# EAGLE board Board (EAGLE 9.7.0)
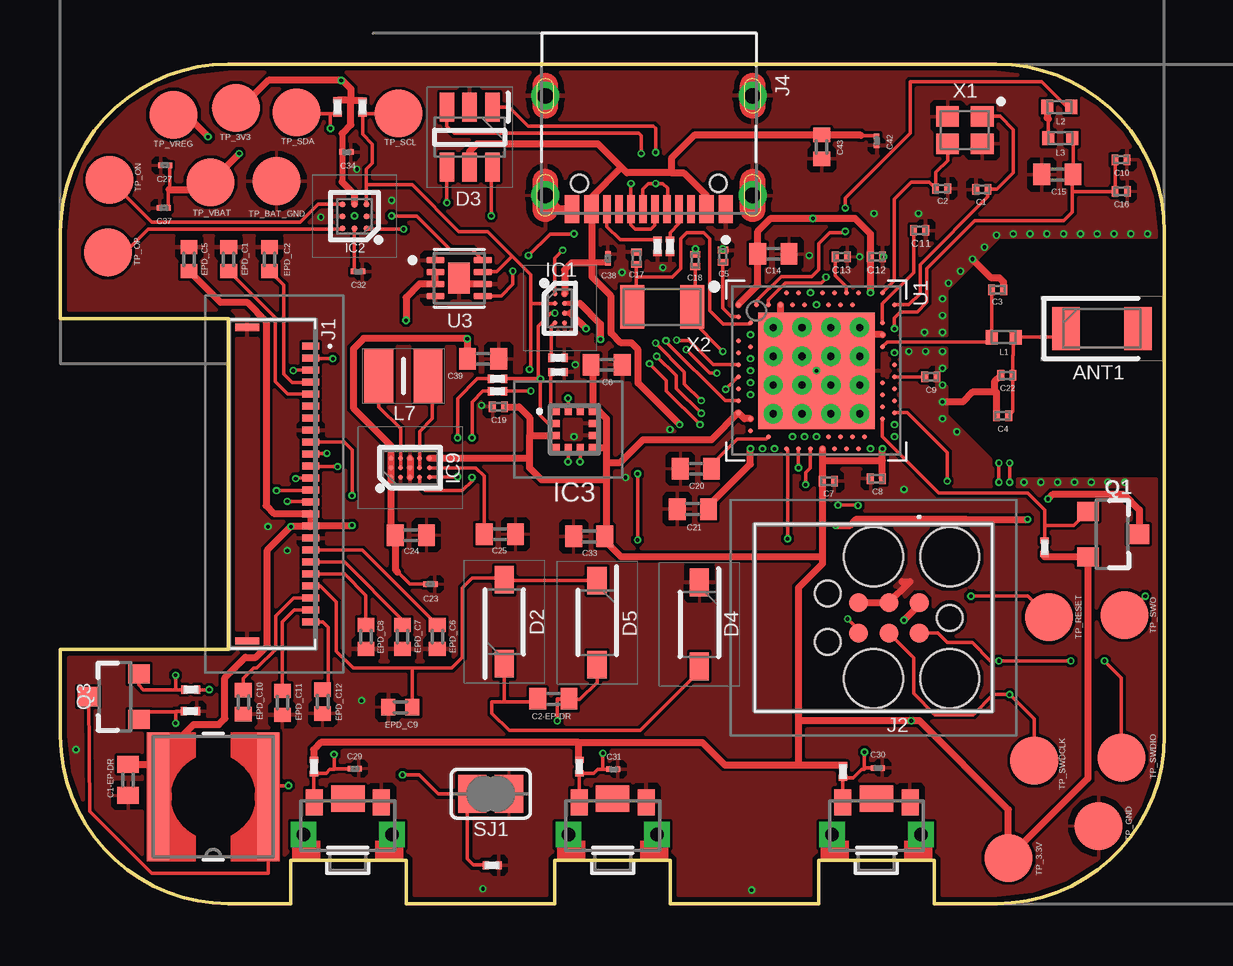
[diagram p0: board, top side]
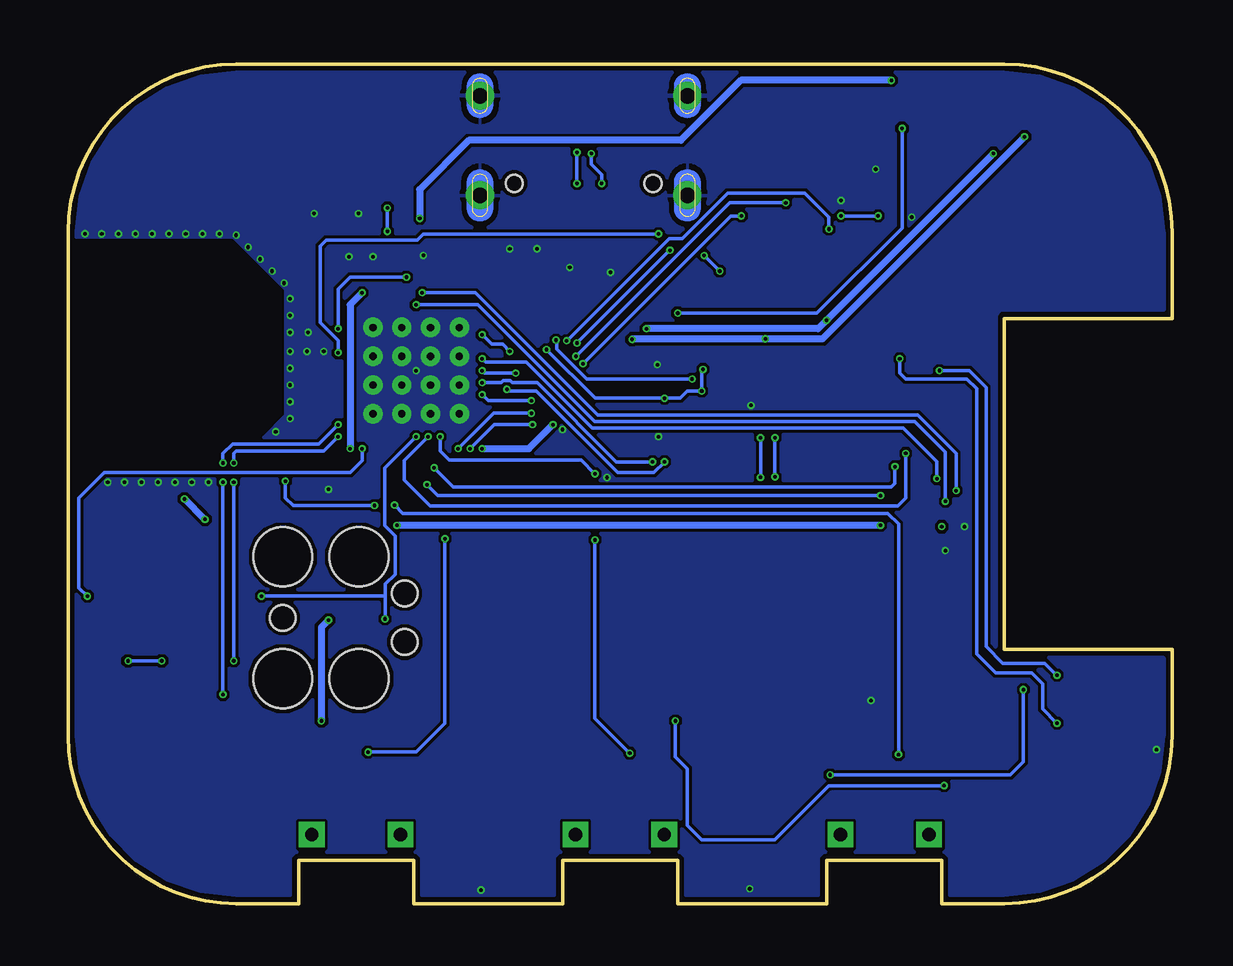
[diagram p1: board, bottom side, seen from below]

Size 46 x 35 mm. Coordinates in mm from the lower left corner, seen from the top.
Outline: 39,0 36.4,0 36.4,1.8 31.6,1.8 31.6,0 25.4,0 25.4,1.8 20.6,1.8 20.6,0 14.4,0 14.4,1.8 9.6,1.8 9.6,0 7,0 arc-90 0,7 0,10.6 7,10.6 7,24.4 0,24.4 0,28 arc-90 7,35 39,35 arc-90 46,28 46,7 arc-90 39,0
Copper layers (1*16): Top / Bottom
Stack-up Default Layer Stack: Top User Defined 0.035mm / Dielectric-1 User Defined 1.6mm / Bottom User Defined 0.035mm
Design rules: minimum copper width 5mil, minimum drill size 0.15mm, copper clearance wire_polygon to wire_polygon 5mil, copper clearance wire_polygon to pad_smd 5mil, copper clearance wire_polygon to via 5mil, copper clearance pad_smd to pad_smd 5mil, copper clearance pad_smd to via 5mil, copper clearance via to via 5mil, copper clearance smd to pad (same net) 5mil, copper clearance smd to smd (same net) 5mil, copper clearance smd to via (same net) 0mil, dimension clearance 0.2mm, via restrict clearance 0mil, restrict clearance 0mil, drill distance 6mil, keepout clearance 0mil

## Footprints (pad centres in the part's own frame; a part is rotated, then mirrored left to right if it is on the bottom)
2450AT18B100E_ANTC3216X140N = smd 1.15 x 1.8: 1 -1.5,0; 2 1.5,0
NORDIC_NRF_3_RESC0201_L = smd 0.28 x 0.43: 1 -0.255,0; 2 0.255,0
ESP32_C6_LIBRARY_1_ESP32_WROVER_EAGLE-LTSPICE_C0402 = smd 0.7 x 0.9: 1 -0.65,0; 2 0.65,0
GRM011R60J152KE01L_2_CAPC0201X13N = smd 0.22 x 0.23: 1 -0.185,0; 2 0.185,0
PERFECT_0402_0402 = smd 0.6 x 0.7: 1 -0.5,0; 2 0.5,0
ESP32_C6_LIBRARY_5_SOD3716X135N = smd 1.15 x 0.8: 1 -1.75,0; 2 1.75,0
ESP32_C6_LIBRARY_3_SOT95P280X145-6N = smd 1.2 x 0.6: 1 -1.25,0.95; 2 -1.25,0; 3 -1.25,-0.95; 4 1.25,-0.95; 5 1.25,0; 6 1.25,0.95
BQ25180YBGR_BGA8C40P2X4_100X155X50 = smd 0.2 x 0.2: A1 -0.2,0.6; A2 0.2,0.6; B1 -0.2,0.2; B2 0.2,0.2; C1 -0.2,-0.2; C2 0.2,-0.2; D1 -0.2,-0.6; D2 0.2,-0.6
DRV2605YZFR_BGA9C50P3X3_144X144X62 = smd 0.25 x 0.25: A1 -0.5,0.5; A2 0,0.5; A3 0.5,0.5; B1 -0.5,0; B2 0,0; B3 0.5,0; C1 -0.5,-0.5; C2 0,-0.5; C3 0.5,-0.5
BMA423_BMA423 = smd 0.3 x 0.35: 1 -0.75,-0.775; 2 -0.25,-0.775; 3 0.25,-0.775; 4 0.75,-0.775; 7 0.75,0.775; 8 0.25,0.775; 9 -0.25,0.775; 10 -0.75,0.775 | smd 0.35 x 0.3: 5 0.775,-0.25; 6 0.775,0.25; 11 -0.775,0.25; 12 -0.775,-0.25
RT6160AWSC_BGA15C40P3X5_140X230X60 = smd 0.216 x 0.216: A1 -0.4,0.8; A2 0,0.8; A3 0.4,0.8; B1 -0.4,0.4; B2 0,0.4; B3 0.4,0.4; C1 -0.4,0; C2 0,0; C3 0.4,0; D1 -0.4,-0.4; D2 0,-0.4; D3 0.4,-0.4; E1 -0.4,-0.8; E2 0,-0.8; E3 0.4,-0.8
503480-2400_5034802400 = smd 0.3 x 0.7: 1 -5.75,1.525; 2 -5.25,1.525; 3 -4.75,1.525; 4 -4.25,1.525; 5 -3.75,1.525; 6 -3.25,1.525; 7 -2.75,1.525; 8 -2.25,1.525; 9 -1.75,1.525; 10 -1.25,1.525; 11 -0.75,1.525; 12 -0.25,1.525; 13 0.25,1.525; 14 0.75,1.525; 15 1.25,1.525; 16 1.75,1.525; 17 2.25,1.525; 18 2.75,1.525; 19 3.25,1.525; 20 3.75,1.525; 21 4.25,1.525; 22 4.75,1.525; 23 5.25,1.525; 24 5.75,1.525 | smd 0.3 x 1: MP1 -6.54,-1.125; MP2 6.54,-1.125
TC2030-IDC_TC2030IDC = smd 0.783 x 0.783: 1 -0.953,-0.635; 2 -0.953,0.635; 3 0.317,-0.635; 4 0.317,0.635; 5 1.588,-0.635; 6 1.588,0.635 | hole 2.451: -2.223,-2.54; -2.223,2.54; 0.952,-2.54; 0.952,2.54 | hole 1.067: -2.223,0; 2.857,-1.016; 2.857,1.016
KH-TYPE-C-16P_KINGHELM_KH-TYPE-C-16P = smd 0.6 x 1.15: A1_B12 -3.2,4.725; A4_B9 -2.4,4.725; A9_B4 2.4,4.725; A12_B1 3.2,4.725 | smd 0.3 x 1.15: A5 -1.25,4.725; A6 -0.25,4.725; A7 0.25,4.725; A8 1.25,4.725; B5 1.75,4.725; B6 0.75,4.725; B7 -0.75,4.725; B8 -1.75,4.725 | drill 0.65 pad 1.05: SH1 -4.32,0; SH2 4.32,0; SH3 -4.32,4.15; SH4 4.32,4.15 | hole 0.7: -2.89,3.65; 2.89,3.65
NORDIC_NRF_2_RESC0402_L = smd 0.5 x 0.6: 1 -0.5,0; 2 0.5,0
ESP32_C6_LIBRARY_2_IND_4828-WE-TPC_WRE = smd 0.9 x 5.3: 1 -2.286,0; 2 2.286,0
MLP2016SR47MT0S1_INDC2016X100N = smd 1.2 x 2.2: 1 -1.028,0; 2 1.028,0
ESP32_C6_LIBRARY_4_ESP32_C6_LIBRARY_4_ESP32_C6_LIBRARY_4_ESP32_C6_LIBRARY_4_ESP32_WROVER_SPARKFUN-DISCRETESEMI_SOT23-3 = smd 0.8 x 0.9: 1 -0.95,-1; 2 0.95,-1; 3 0,1.1
ERA-1AEB3401C_0201 = smd 0.35 x 0.25: 1 0,0.275; 2 0,-0.275
ESP32_C6_LIBRARY_7_JUMPER_SJ = smd 1.168 x 1.6: 1 -0.762,0; 2 0.762,0
2025-10-22_07-23-44_LIBRARY_SW_EVP-AKE31A_PAN = smd 0.711 x 1.092: 1 -1.4,-0.972; 2 1.4,-0.972 | drill 0.559 pad 0.914 square: 3 -1.848,0.381; 4 1.848,0.381 | smd 1.397 x 1.092: 5 0,-1.124
HECTOR_WATCH_1_TP20R = smd 2 x 2: TP 0,0
NORDIC_NRF_4_AQFN50P700X700X85_HS-74N = smd 4.85 x 4.85: P$74 0,0 | drill 0.3 pad 0.6: P$75 -1.8,1.8; P$76 -0.6,1.8; P$77 0.6,1.8; P$78 1.8,1.8; P$79 -1.8,0.6; P$80 -0.6,0.6; P$81 0.6,0.6; P$82 1.8,0.6; P$83 -1.8,-0.6; P$84 -0.6,-0.6; P$85 0.6,-0.6; P$86 1.8,-0.6; P$87 -1.8,-1.8; P$88 -0.6,-1.8; P$89 0.6,-1.8; P$90 1.8,-1.8 | smd 0.2 x 0.2: P$A8 -1.25,3.25; P$A10 -0.75,3.25; P$A12 -0.25,3.25; P$A14 0.25,3.25; P$A16 0.75,3.25; P$A18 1.25,3.25; P$A20 1.75,3.25; P$A22 2.25,3.25; P$A23 2.75,3.25; P$AA24 3.25,-2.25; P$AB2 -2.75,-2.5; P$AC5 -2,-2.75; P$AC9 -1,-2.75; P$AC11 -0.5,-2.75; P$AC13 0,-2.75; P$AC15 0.5,-2.75; P$AC17 1,-2.75; P$AC19 1.5,-2.75; P$AC21 2,-2.75; P$AC24 3.25,-2.75; P$AD2 -2.75,-3.25; P$AD4 -2.25,-3.25; P$AD6 -1.75,-3.25; P$AD8 -1.25,-3.25; P$AD10 -0.75,-3.25; P$AD12 -0.25,-3.25; P$AD14 0.25,-3.25; P$AD16 0.75,-3.25; P$AD18 1.25,-3.25; P$AD20 1.75,-3.25; P$AD22 2.25,-3.25; P$AD23 2.75,-3.25; P$B1 -3.25,2.75; P$B3 -2.5,2.75; P$B5 -2,2.75; P$B7 -1.5,2.75; P$B9 -1,2.75; P$B11 -0.5,2.75; P$B13 0,2.75; P$B15 0.5,2.75; P$B17 1,2.75; P$B19 1.5,2.75; P$B24 3.25,2.75; P$C1 -3.25,2.25; P$D2 -2.75,2; P$D23 2.75,2; P$E24 3.25,1.75; P$F2 -2.75,1.5; P$F23 2.75,1.5; P$G1 -3.25,1.25; P$H2 -2.75,1; P$H23 2.75,1; P$J1 -3.25,0.75; P$J24 3.25,0.75; P$K2 -2.75,0.5; P$L1 -3.25,0.25; P$L24 3.25,0.25; P$M2 -2.75,0; P$N1 -3.25,-0.25; P$N24 3.25,-0.25; P$P2 -2.75,-0.5; P$P23 2.75,-0.5; P$R1 -3.25,-0.75; P$R24 3.25,-0.75; P$T2 -2.75,-1; P$T23 2.75,-1; P$U1 -3.25,-1.25; P$U24 3.25,-1.25; P$V23 2.75,-1.5; P$W1 -3.25,-1.75; P$W24 3.25,-1.75; P$Y2 -2.75,-2; P$Y23 2.75,-2
ESP32_C6_LIBRARY_SON50P200X200X80-9N = smd 0.76 x 0.27: 1 -0.985,0.75; 2 -0.985,0.25; 3 -0.985,-0.25; 4 -0.985,-0.75; 5 0.985,-0.75; 6 0.985,-0.25; 7 0.985,0.25; 8 0.985,0.75 | smd 0.9 x 1.3: 9 0,0
NORDIC_NRF_BT-XTAL_2016_N = smd 0.95 x 0.85: 1 -0.725,-0.575; 2 0.725,-0.575; 3 0.725,0.575; 4 -0.725,0.575
NORDIC_NRF_1_XTAL_3215_N = smd 1 x 1.8: 1 -1.25,0; 2 1.25,0

## Placement (x,y rotation side)
ANT1  2450AT18B100E  [2450AT18B100E_ANTC3216X140N]  43.39,23.98 0 top
C1  12pF  [NORDIC_NRF_3_RESC0201_L]  38.39,29.78 180 top
C1-EP-DR  10μF  [ESP32_C6_LIBRARY_1_ESP32_WROVER_EAGLE-LTSPICE_C0402]  2.82,5.16 270 top
C2  12pF  [NORDIC_NRF_3_RESC0201_L]  36.72,29.81 0 top
C2-EP-DR  4.7μF/25V  [ESP32_C6_LIBRARY_1_ESP32_WROVER_EAGLE-LTSPICE_C0402]  20.54,8.54 0 top
C3  1pF  [NORDIC_NRF_3_RESC0201_L]  39.05,25.59 0 top
C4  1pF  [NORDIC_NRF_3_RESC0201_L]  39.26,20.34 180 top
C5  100nF  [NORDIC_NRF_3_RESC0201_L]  27.6,26.99 90 top
C6  4.7μF  [ESP32_C6_LIBRARY_1_ESP32_WROVER_EAGLE-LTSPICE_C0402]  22.76,22.46 0 top
C7  100nF  [NORDIC_NRF_3_RESC0201_L]  32,17.61 0 top
C8  100nF  [NORDIC_NRF_3_RESC0201_L]  34,17.71 180 top
C9  820pF  [NORDIC_NRF_3_RESC0201_L]  36.27,21.96 0 top
C10  N.C.  [NORDIC_NRF_3_RESC0201_L]  44.19,31.01 0 top
C11  100nF  [NORDIC_NRF_3_RESC0201_L]  35.8,28.07 0 top
C12  100nF  [NORDIC_NRF_3_RESC0201_L]  34,26.96 0 top
C13  N.C.  [NORDIC_NRF_3_RESC0201_L]  32.54,26.96 0 top
C14  4.7μF  [ESP32_C6_LIBRARY_1_ESP32_WROVER_EAGLE-LTSPICE_C0402]  29.71,27.09 0 top
C15  1.0μF  [ESP32_C6_LIBRARY_1_ESP32_WROVER_EAGLE-LTSPICE_C0402]  41.54,30.39 180 top
C16  47nF  [NORDIC_NRF_3_RESC0201_L]  44.2,29.69 0 top
C17  12pF  [NORDIC_NRF_3_RESC0201_L]  24,26.91 270 top
C18  12pF  [NORDIC_NRF_3_RESC0201_L]  26.45,26.81 270 top
C19  100nF  [NORDIC_NRF_3_RESC0201_L]  18.25,20.71 180 top
C20  4.7μF  [ESP32_C6_LIBRARY_1_ESP32_WROVER_EAGLE-LTSPICE_C0402]  26.48,18.13 180 top
C21  4.7μF  [ESP32_C6_LIBRARY_1_ESP32_WROVER_EAGLE-LTSPICE_C0402]  26.35,16.45 180 top
C22  N.C.  [NORDIC_NRF_3_RESC0201_L]  39.43,22.02 180 top
C23  0.1μF  [GRM011R60J152KE01L_2_CAPC0201X13N]  15.42,13.32 0 top
C24  10μF  [ESP32_C6_LIBRARY_1_ESP32_WROVER_EAGLE-LTSPICE_C0402]  14.6,15.36 180 top
C25  22μF  [ESP32_C6_LIBRARY_1_ESP32_WROVER_EAGLE-LTSPICE_C0402]  18.31,15.4 0 top
C27  0.1μF  [GRM011R60J152KE01L_2_CAPC0201X13N]  4.36,30.78 0 top
C29  1μF  [GRM011R60J152KE01L_2_CAPC0201X13N]  12.26,5.63 180 top
C30  1μF  [GRM011R60J152KE01L_2_CAPC0201X13N]  34.06,5.66 180 top
C31  1μF  [GRM011R60J152KE01L_2_CAPC0201X13N]  23.04,5.6 180 top
C32  1μF  [GRM011R60J152KE01L_2_CAPC0201X13N]  12.4,26.35 180 top
C33  22μF  [ESP32_C6_LIBRARY_1_ESP32_WROVER_EAGLE-LTSPICE_C0402]  22.03,15.31 180 top
C34  0.1μF  [GRM011R60J152KE01L_2_CAPC0201X13N]  11.92,31.33 180 top
C37  1μF  [GRM011R60J152KE01L_2_CAPC0201X13N]  4.31,29 0 top
C38  1μF  [GRM011R60J152KE01L_2_CAPC0201X13N]  22.82,26.9 270 top
C39  10μF  [ESP32_C6_LIBRARY_1_ESP32_WROVER_EAGLE-LTSPICE_C0402]  17.61,22.71 0 top
C42  0.1μF  [GRM011R60J152KE01L_2_CAPC0201X13N]  34.01,31.8 90 top
C43  4.7μF  [PERFECT_0402_0402]  31.72,31.55 270 top
D2  MBR0530  [ESP32_C6_LIBRARY_5_SOD3716X135N]  18.49,11.75 90 top
D3  USBLC6-2SC6Y  [ESP32_C6_LIBRARY_3_SOT95P280X145-6N]  17.05,31.95 270 top
D4  MBR0530  [ESP32_C6_LIBRARY_5_SOD3716X135N]  26.62,11.64 270 top
D5  MBR0530  [ESP32_C6_LIBRARY_5_SOD3716X135N]  22.36,11.72 270 top
EPD_C1  1μF/50V  [PERFECT_0402_0402]  7.01,26.87 270 top
EPD_C2  1μF/50V  [PERFECT_0402_0402]  8.71,26.87 270 top
EPD_C5  1μF/50V  [PERFECT_0402_0402]  5.36,26.87 270 top
EPD_C6  1μF/50V  [PERFECT_0402_0402]  15.7,11.12 90 top
EPD_C7  1μF/50V  [PERFECT_0402_0402]  14.25,11.12 90 top
EPD_C8  1μF/50V  [PERFECT_0402_0402]  12.73,11.12 90 top
EPD_C9  1μF/50V  [PERFECT_0402_0402]  14.16,8.19 0 top
EPD_C10  1μF/50V  [PERFECT_0402_0402]  7.62,8.4 90 top
EPD_C11  1μF/50V  [PERFECT_0402_0402]  9.25,8.37 90 top
EPD_C12  1μF/50V  [PERFECT_0402_0402]  10.92,8.42 90 top
IC1  BQ25180YBGR  [BQ25180YBGR_BGA8C40P2X4_100X155X50]  20.81,24.82 0 top
IC2  DRV2605YZFR  [DRV2605YZFR_BGA9C50P3X3_144X144X62]  12.25,28.66 180 top
IC3  BMA423  [BMA423_BMA423]  21.41,19.77 270 top
IC9  RT6160AWSC  [RT6160AWSC_BGA15C40P3X5_140X230X60]  14.57,18.17 90 top
J1  503480-2400  [503480-2400_5034802400]  8.9,17.49 270 top
J2  TC2030-IDC  [TC2030-IDC_TC2030IDC]  34.83,11.92 180 top
J4  KH-TYPE-C-16P  [KH-TYPE-C-16P_KINGHELM_KH-TYPE-C-16P]  24.52,33.68 180 top
L1  3.9nH  [NORDIC_NRF_2_RESC0402_L]  39.3,23.61 0 top
L2  10μH  [NORDIC_NRF_2_RESC0402_L]  41.61,33.21 180 top
L3  15nH  [NORDIC_NRF_2_RESC0402_L]  41.66,31.91 0 top
L5  68μH  [ESP32_C6_LIBRARY_2_IND_4828-WE-TPC_WRE]  6.37,4.46 180 top
L7  FTC252012SR47MBCA  [MLP2016SR47MT0S1_INDC2016X100N]  14.29,22 0 top
Q1  20V/4.2A/52mΩ/1.4W  [ESP32_C6_LIBRARY_4_ESP32_C6_LIBRARY_4_ESP32_C6_LIBRARY_4_ESP32_C6_LIBRARY_4_ESP32_WROVER_SPARKFUN-DISCRETESEMI_SOT23-3]  43.81,15.4 270 top
Q3  SI1308EDL-T1-GE3  [ESP32_C6_LIBRARY_4_ESP32_C6_LIBRARY_4_ESP32_C6_LIBRARY_4_ESP32_C6_LIBRARY_4_ESP32_WROVER_SPARKFUN-DISCRETESEMI_SOT23-3]  2.27,8.63 90 top
R1_EP_DR  0.47  [ERA-1AEB3401C_0201]  5.43,8.92 270 top
R1_TYPE_SEL  2.2  [ERA-1AEB3401C_0201]  17.99,1.6 270 top
R1_USB  5k1  [ERA-1AEB3401C_0201]  25.4,27.4 180 top
R2  0  [ERA-1AEB3401C_0201]  18.21,21.88 270 top
R2_EP_DR  10k  [ERA-1AEB3401C_0201]  5.42,8.02 270 top
R2_USB  5k1  [ERA-1AEB3401C_0201]  24.87,27.4 0 top
R3  0  [ERA-1AEB3401C_0201]  20.73,22.16 270 top
R4  0  [ERA-1AEB3401C_0201]  18.21,21.36 270 top
R5  10k  [ERA-1AEB3401C_0201]  32.6,5.51 180 top
R7  10k  [ERA-1AEB3401C_0201]  10.56,5.71 180 top
R8  10k  [ERA-1AEB3401C_0201]  21.62,5.71 180 top
R9  10k  [ERA-1AEB3401C_0201]  20.73,22.76 270 top
R17  3k3  [ERA-1AEB3401C_0201]  12.59,33.21 0 top
R18  3k3  [ERA-1AEB3401C_0201]  11.55,33.21 0 top
R_PWR_EPD  10k  [ERA-1AEB3401C_0201]  41.01,14.86 0 top
SJ1  [ESP32_C6_LIBRARY_7_JUMPER_SJ]  17.93,4.58 180 top
SW_DN  2025-10-22_07-23-44_LIBRARY_EVP-AKE31ASW_EVP-AKE31A_PAN  [2025-10-22_07-23-44_LIBRARY_SW_EVP-AKE31A_PAN]  11.97,3.26 180 top
SW_ENT  2025-10-22_07-23-44_LIBRARY_EVP-AKE31ASW_EVP-AKE31A_PAN  [2025-10-22_07-23-44_LIBRARY_SW_EVP-AKE31A_PAN]  23.01,3.26 180 top
SW_UP  2025-10-22_07-23-44_LIBRARY_EVP-AKE31ASW_EVP-AKE31A_PAN  [2025-10-22_07-23-44_LIBRARY_SW_EVP-AKE31A_PAN]  34,3.26 180 top
TP_3.3V  HECTOR_WATCH_1_TPTP20R  [HECTOR_WATCH_1_TP20R]  39.5,1.91 0 top
TP_3V3  HECTOR_WATCH_1_TPTP20R  [HECTOR_WATCH_1_TP20R]  7.31,33.17 0 top
TP_BAT_GND  HECTOR_WATCH_1_TPTP20R  [HECTOR_WATCH_1_TP20R]  9,30.12 0 top
TP_GND  HECTOR_WATCH_1_TPTP20R  [HECTOR_WATCH_1_TP20R]  43.25,3.23 0 top
TP_ON  HECTOR_WATCH_1_TPTP20R  [HECTOR_WATCH_1_TP20R]  2.05,30.17 90 top
TP_OP  HECTOR_WATCH_1_TPTP20R  [HECTOR_WATCH_1_TP20R]  1.98,27.15 90 top
TP_RESET  HECTOR_WATCH_1_TPTP20R  [HECTOR_WATCH_1_TP20R]  41.18,11.94 0 top
TP_SCL  HECTOR_WATCH_1_TPTP20R  [HECTOR_WATCH_1_TP20R]  14.09,32.94 0 top
TP_SDA  HECTOR_WATCH_1_TPTP20R  [HECTOR_WATCH_1_TP20R]  9.83,32.98 0 top
TP_SWDCLK  HECTOR_WATCH_1_TPTP20R  [HECTOR_WATCH_1_TP20R]  40.58,5.96 0 top
TP_SWDIO  HECTOR_WATCH_1_TPTP20R  [HECTOR_WATCH_1_TP20R]  44.21,6.08 0 top
TP_SWO  HECTOR_WATCH_1_TPTP20R  [HECTOR_WATCH_1_TP20R]  44.34,12.03 0 top
TP_VBAT  HECTOR_WATCH_1_TPTP20R  [HECTOR_WATCH_1_TP20R]  6.25,30.07 0 top
TP_VREG  HECTOR_WATCH_1_TPTP20R  [HECTOR_WATCH_1_TP20R]  4.71,32.89 0 top
U1  NRF52840_QF  [NORDIC_NRF_4_AQFN50P700X700X85_HS-74N]  31.5,22.22 0 top
U3  MAX17048G+T10  [ESP32_C6_LIBRARY_SON50P200X200X80-9N]  16.61,26.08 0 top
X1  32MHz  [NORDIC_NRF_BT-XTAL_2016_N]  37.69,32.25 180 top
X2  32.768kHz  [NORDIC_NRF_1_XTAL_3215_N]  25.07,24.88 180 top

## Library data of the parts
ANT1 = C:/Users/albab/AppData/Local/Temp/Neutron/ElectronFileOutput/17580/lbr-745c33fa-0988-44a0-ba7f-04a992b1e21d/InkTime_v5.lbr; ARROW_PART_NUMBER: 2450AT18B100E; ARROW_PRICE-STOCK: https://www.arrow.com/en/products/2450at18b100e/johanson-dielectrics?utm_currency=USD&region=nac; DESCRIPTION: Antennas 2.45GHz ANTENNA; HEIGHT: 1.4mm; MANUFACTURER_NAME: JOHANSON TECHNOLOGY; MANUFACTURER_PART_NUMBER: 2450AT18B100E; MOUSER_PART_NUMBER: 609-2450AT18B100E; MOUSER_PRICE-STOCK: https://www.mouser.co.uk/ProductDetail/Johanson-Technology/2450AT18B100E?qs=yCnrNFeXz%252Bh5MFsFIXGZGA%3D%3D
C1-C5 C7-C13 C16-C19 C22 C43 EPD_C1 EPD_C2 EPD_C5-EPD_C12 L1-L3 R1_EP_DR R1_TYPE_SEL R1_USB R2 R2_EP_DR R2_USB R3-R5 R7-R9 R17 R18 R_PWR_EPD TP_3.3V TP_3V3 TP_BAT_GND TP_GND TP_ON TP_OP TP_RESET TP_SCL TP_SDA TP_SWDCLK TP_SWDIO TP_SWO TP_VBAT TP_VREG U1 X1 X2 = C:/Users/albab/AppData/Local/Temp/Neutron/ElectronFileOutput/17580/lbr-745c33fa-0988-44a0-ba7f-04a992b1e21d/InkTime_v5.lbr
C1-EP-DR C2-EP-DR C6 C14 C15 C20 C21 C24 C25 C33 C39 = C:/Users/albab/AppData/Local/Temp/Neutron/ElectronFileOutput/17580/lbr-745c33fa-0988-44a0-ba7f-04a992b1e21d/InkTime_v5.lbr; SPICEMODEL: NONE; SPICEPREFIX: C
C23 C27 C29-C32 C34 C37 C38 C42 = InkTime_v5; AVAILABILITY: In Stock; CHECK_PRICES: https://www.snapeda.com/parts/GRM011R60J152KE01L/Murata/view-part/?ref=eda; DESCRIPTION: SMD Capacitor X5R(EIA) with Capacitance: 1500pF Tol. 10%. Rated Voltage: 6.3Vdc; MF: Murata; MP: GRM011R60J152KE01L; PACKAGE: 0201 Murata; PRICE: None; SNAPEDA_LINK: https://www.snapeda.com/parts/GRM011R60J152KE01L/Murata/view-part/?ref=snap
D2 D4 D5 = C:/Users/albab/AppData/Local/Temp/Neutron/ElectronFileOutput/17580/lbr-745c33fa-0988-44a0-ba7f-04a992b1e21d/InkTime_v5.lbr; AVAILABILITY: In Stock; CHECK_PRICES: https://www.snapeda.com/parts/MBR0530/Onsemi/view-part/?ref=eda; DESCRIPTION: Diode Schottky 30 V 500mA Surface Mount SOD-123; MF: ON Semiconductor; MP: MBR0530; PACKAGE: SOD-123-2 ON Semiconductor; PRICE: None; PURCHASE-URL: https://www.snapeda.com/api/url_track_click_mouser/?unipart_id=179458&manufacturer=ON Semiconductor&part_name=MBR0530&search_term=None; SNAPEDA_LINK: https://www.snapeda.com/parts/MBR0530/Onsemi/view-part/?ref=snap
D3 = InkTime_v5; AVAILABILITY: In Stock; CHECK_PRICES: https://www.snapeda.com/parts/USBLC6-2SC6Y/STMicroelectronics/view-part/?ref=eda; DESCRIPTION: 17V Clamp 5A (8/20µs) Ipp Tvs Diode Surface Mount SOT-23-6; MF: STMicroelectronics; MP: USBLC6-2SC6Y; PACKAGE: SOT-23-6 STMicroelectronics; PRICE: None; SNAPEDA_LINK: https://www.snapeda.com/parts/USBLC6-2SC6Y/STMicroelectronics/view-part/?ref=snap
IC1 = C:/Users/albab/AppData/Local/Temp/Neutron/ElectronFileOutput/17580/lbr-745c33fa-0988-44a0-ba7f-04a992b1e21d/InkTime_v5.lbr; ARROW_PART_NUMBER: BQ25180YBGR; ARROW_PRICE-STOCK: https://www.arrow.com/en/products/bq25180ybgr/texas-instruments?utm_currency=USD&region=nac; DESCRIPTION: Charger IC Lithium Ion/Polymer, Lithium Iron Phosphate 8-DSBGA (1.6x1.1); HEIGHT: 0.5mm; MANUFACTURER_NAME: Texas Instruments; MANUFACTURER_PART_NUMBER: BQ25180YBGR; MOUSER_PART_NUMBER: 595-BQ25180YBGR; MOUSER_PRICE-STOCK: https://www.mouser.co.uk/ProductDetail/Texas-Instruments/BQ25180YBGR?qs=doiCPypUmgEWjAK%252BJAX6Tw%3D%3D
IC2 = InkTime_v5; ARROW_PART_NUMBER: DRV2605YZFR; ARROW_PRICE-STOCK: https://www.arrow.com/en/products/drv2605yzfr/texas-instruments?region=nac; DESCRIPTION: Haptic Driver for ERM/LRA with Built-In Library and Smart Loop Architecture; HEIGHT: 0.625mm; MANUFACTURER_NAME: Texas Instruments; MANUFACTURER_PART_NUMBER: DRV2605YZFR
IC3 = C:/Users/albab/AppData/Local/Temp/Neutron/ElectronFileOutput/17580/lbr-745c33fa-0988-44a0-ba7f-04a992b1e21d/InkTime_v5.lbr; ARROW_PART_NUMBER: BMA423; ARROW_PRICE-STOCK: https://www.arrow.com/en/products/bma423/bosch; DESCRIPTION: Accelerometers Triaxial low-g 12bit Acceleration Sensor; HEIGHT: 1mm; MANUFACTURER_NAME: BOSCH; MANUFACTURER_PART_NUMBER: BMA423; MOUSER_PART_NUMBER: 262-BMA423; MOUSER_PRICE-STOCK: https://www.mouser.co.uk/ProductDetail/Bosch-Sensortec/BMA423?qs=HXFqYaX1Q2xC%252BSgeGoX3mg%3D%3D
IC9 = C:/Users/albab/AppData/Local/Temp/Neutron/ElectronFileOutput/17580/lbr-745c33fa-0988-44a0-ba7f-04a992b1e21d/InkTime_v5.lbr; DESCRIPTION: Buck-Boost Regulator Positive Output Step-Up/Step-Down I2C DC-DC Controller IC 15-WL-CSP (BSC) (1.4x2.3); HEIGHT: 0.6mm; MANUFACTURER_NAME: RICHTEK; MANUFACTURER_PART_NUMBER: RT6160AWSC; MOUSER_PART_NUMBER: 835-RT6160AWSC; MOUSER_PRICE-STOCK: https://www.mouser.co.uk/ProductDetail/Richtek/RT6160AWSC?qs=amGC7iS6iy%2FLd9PSoixZXQ%3D%3D
J1 = InkTime_v5; DESCRIPTION: FFC & FPC Connectors 0.5mm FPC RA SMT Dual Contact 24Ckt; HEIGHT: 1.87mm; MANUFACTURER_NAME: Molex; MANUFACTURER_PART_NUMBER: 503480-2400; MOUSER_PART_NUMBER: 538-503480-2400; MOUSER_PRICE-STOCK: https://www.mouser.co.uk/ProductDetail/Molex/503480-2400?qs=OAhjpuo3Vu7efIoxFh9AOw%3D%3D
J2 = C:/Users/albab/AppData/Local/Temp/Neutron/ElectronFileOutput/17580/lbr-745c33fa-0988-44a0-ba7f-04a992b1e21d/InkTime_v5.lbr; DESCRIPTION: CABLE ADAPTER 6 POS; HEIGHT: 19mm; MANUFACTURER_NAME: Tag Connect; MANUFACTURER_PART_NUMBER: TC2030-IDC
J4 = InkTime_v5; AVAILABILITY: Not in stock; CHECK_PRICES: https://www.snapeda.com/parts/KH-TYPE-C-16P/Kinghelm/view-part/?ref=eda; MF: kinghelm; MP: KH-TYPE-C-16P; PACKAGE: None; PRICE: None; SNAPEDA_LINK: https://www.snapeda.com/parts/KH-TYPE-C-16P/Kinghelm/view-part/?ref=snap
L5 = C:/Users/albab/AppData/Local/Temp/Neutron/ElectronFileOutput/17580/lbr-745c33fa-0988-44a0-ba7f-04a992b1e21d/InkTime_v5.lbr; COPYRIGHT: Copyright (C) 2024 Ultra Librarian. All rights reserved.; MANUFACTURER_PART_NUMBER: 744043680; MFR_NAME: Wurth Electronics
L7 = C:/Users/albab/AppData/Local/Temp/Neutron/ElectronFileOutput/17580/lbr-745c33fa-0988-44a0-ba7f-04a992b1e21d/InkTime_v5.lbr; DESCRIPTION: SMD / SMT Inductors (Coils), L=0.47?H, L x W x T :; HEIGHT: 1mm; JLCPCB: https://jlcpcb.com/partdetail/6763488-FTC252012SR47MBCA/C5832368; MANUFACTURER_NAME: TDK; MANUFACTURER_PART_NUMBER: FTC252012SR47MBCA
Q1 = InkTime_v5; PROD_ID: TRAN-14388
Q3 = C:/Users/albab/AppData/Local/Temp/Neutron/ElectronFileOutput/17580/lbr-745c33fa-0988-44a0-ba7f-04a992b1e21d/InkTime_v5.lbr; AVAILABILITY: In Stock; CHECK_PRICES: https://www.snapeda.com/parts/SI1308EDL-T1-GE3/Vishay+Siliconix/view-part/?ref=eda; DESCRIPTION: Si1308EDL-T1-GE3 N-channel MOSFET Transistor, 1.5 A, 30 V, 3-Pin SC-70 | Siliconix / Vishay SI1308EDL-T1-GE3; MF: Vishay Siliconix; MP: SI1308EDL-T1-GE3; PACKAGE: SOT-323 Vishay Semiconductor; PRICE: None; PURCHASE-URL: https://www.snapeda.com/api/url_track_click_mouser/?unipart_id=274603&manufacturer=Vishay Siliconix&part_name=SI1308EDL-T1-GE3&search_term=None; SNAPEDA_LINK: https://www.snapeda.com/parts/SI1308EDL-T1-GE3/Vishay+Siliconix/view-part/?ref=snap
SJ1 = InkTime_v5
SW_DN SW_ENT SW_UP = InkTime_v5; COPYRIGHT: Copyright (C) 2025 Ultra Librarian. All rights reserved.; DIGI-KEY_PART_NUMBER_1: P123437TR-ND; DIGI-KEY_PART_NUMBER_2: P123437CT-ND; DIGI-KEY_PART_NUMBER_3: P123437DKR-ND; MANUFACTURER_NAME: Panasonic; MANUFACTURER_PART_NUMBER: EVP-AKE31A
U3 = InkTime_v5; AVAILABILITY: In Stock; CHECK_PRICES: https://www.snapeda.com/parts/MAX17048G+T10/Analog+Devices/view-part/?ref=eda; DESCRIPTION: 3µA 1-Cell/2-Cell Fuel Gauge with ModelGauge; MF: Analog Devices; MP: MAX17048G+T10; PACKAGE: TDFN-8 Maxim; PRICE: None; PURCHASE-URL: https://www.snapeda.com/api/url_track_click_mouser/?unipart_id=329239&manufacturer=Analog Devices&part_name=MAX17048G+T10&search_term=None; SNAPEDA_LINK: https://www.snapeda.com/parts/MAX17048G+T10/Analog+Devices/view-part/?ref=snap

## Nets
3V3: C6.1 C7.1 C8.1 C12.1 C14.1 C19.1 C33.1 C34.2 IC2.C2 IC3.3 IC3.7 IC3.10 IC9.E3 J2.1 Q1.2 R5.2 R7.2 R8.2 R17.1 R18.1 R_PWR_EPD.2 TP_3.3V.TP TP_3V3.TP U1.P$A22 U1.P$AD14 U1.P$AD23 U1.P$B1 U1.P$W1 U1.P$Y2
ALERT: U1.P$J24 U3.5
D+: D3.4 U1.P$AD6
D-: D3.6 U1.P$AD4
DEC1: C5.1 U1.P$C1
DEC3: C11.1 U1.P$D23
DEC4_6: C10.1 C15.1 C16.1 L3.2 U1.P$B5 U1.P$E24
DN: D3.1 J4.A7 J4.B7
DP: D3.3 J4.A6 J4.B6
EPD_3V3: C1-EP-DR.1 EPD_C5.2 J1.15 J1.16 L5.2 Q1.3
EPD_BUSY: J1.9 U1.P$AD12
EPD_CS: J1.12 U1.P$K2
EPD_DC: J1.11 U1.P$AD10
EPD_RST: J1.10 U1.P$AC11
GDR: J1.2 Q3.1 R2_EP_DR.2
GND: C1-EP-DR.2 C1.2 C2.2 C3.2 C4.2 C5.2 C6.2 C7.2 C8.2 C9.2 C10.2 C11.2 C12.2 C13.2 C14.2 C15.2 C16.2 C17.1 C18.1 C19.2 C20.2 C21.2 C22.2 C23.2 C24.1 C25.2 C27.1 C29.1 C30.1 C31.1 C32.1 C33.2 C34.1 C37.1 C38.1 C39.2 C42.1 C43.2 D3.2 D4.1 EPD_C1.1 EPD_C2.1 EPD_C5.1 EPD_C6.1 EPD_C7.1 EPD_C8.1 EPD_C9.1 EPD_C10.1 EPD_C11.1 EPD_C12.1 IC1.D2 IC2.B1 IC2.B3 IC3.8 IC3.9 IC9.B1 IC9.C1 IC9.C2 IC9.C3 J1.8 J1.17 J1.MP1 J1.MP2 J2.3 J2.5 J4.A1_B12 J4.A12_B1 J4.SH1 J4.SH2 J4.SH3 J4.SH4 R1_TYPE_SEL.1 R1_USB.1 R2_EP_DR.1 R2_USB.2 R3.1 R9.1 SJ1.1 SW_DN.1 SW_ENT.1 SW_UP.1 TP_BAT_GND.TP TP_GND.TP U1.P$74 U1.P$75 U1.P$76 U1.P$77 U1.P$78 U1.P$79 U1.P$80 U1.P$81 U1.P$82 U1.P$83 U1.P$84 U1.P$85 U1.P$86 U1.P$87 U1.P$88 U1.P$89 U1.P$90 U1.P$B7 U1.P$F23 U3.1 U3.4 U3.6 U3.9 X1.2 X1.4
HAPTIC_EN: IC2.A1 U1.P$U1
IMU_INT1: IC3.5 U1.P$N1
IMU_INT2: IC3.6 U1.P$P2
LX1: IC9.B2 IC9.B3 L7.1
LX2: IC9.D2 IC9.D3 L7.2
MOSI: J1.14 U1.P$B13
N$1: L2.1 U1.P$B3
N$2: L2.2 L3.1
N$3: C13.1 U1.P$A18
N$5: C1.1 U1.P$B24 X1.1
N$6: C2.1 U1.P$A23 X1.3
N$7: C3.1 L1.1 U1.P$H23
N$8: ANT1.1 C4.1 C22.1 L1.2
N$9: C9.1 U1.P$N24
N$10: C20.1 U1.P$AC5
N$11: IC9.D1 R4.2
N$12: IC9.E1 R2.2
N$13: IC1.D1 R9.2
N$14: C25.1 IC9.E2
N$15: IC3.1 R3.2
N$16: C2-EP-DR.2 D5.2 L5.1 Q3.3
N$17: C2-EP-DR.1 D2.1 D4.2
N$18: R1_EP_DR.1 R1_TYPE_SEL.2 SJ1.2
N$19: EPD_C2.2 J1.4
N$20: EPD_C1.2 J1.5
N$21: EPD_C6.2 J1.18
N$22: EPD_C7.2 J1.19
N$23: EPD_C8.2 J1.20
N$24: J4.A5 R1_USB.2
N$25: EPD_C10.2 J1.22
N$26: J4.B5 R2_USB.1
N$27: EPD_C12.2 J1.24
N$32: C32.2 IC2.A2
OUT+: IC2.A3 TP_OP.TP
OUT-: IC2.C3 TP_ON.TP
P0.00/XL1: C17.2 U1.P$D2 X2.2
P0.01/XL2: C18.2 U1.P$F2 X2.1
P0.04: U1.P$J1
P0.09: U1.P$L24
P0.13: C30.2 R5.1 SW_UP.2 U1.P$AD8
P0.14: C31.2 R8.1 SW_ENT.2 U1.P$AC9
P0.19: U1.P$AC15
P0.20: U1.P$AD16
P0.21: U1.P$AC17
P0.22: U1.P$AD18
P0.23: U1.P$AC19
P0.24: U1.P$AD20
P0.25: U1.P$AC21
P0.26: U1.P$G1
P0.27: U1.P$H2
P0.28: U1.P$B11
P0.29: U1.P$A10
P0.30: U1.P$B9
P0.31: U1.P$A8
P1.01: Q1.1 R_PWR_EPD.1 U1.P$Y23
P1.02: C29.2 R7.1 SW_DN.2 U1.P$W24
P1.03: U1.P$V23
P1.04: U1.P$U24
P1.05: U1.P$T23
P1.06: U1.P$R24
P1.07: U1.P$P23
P1.09: U1.P$R1
P1.10: U1.P$A20
P1.11: U1.P$B19
P1.12: U1.P$B17
P1.13: U1.P$A16
P1.14: U1.P$B15
P1.15: U1.P$A14
PMIC_INT: IC1.A1 U1.P$T2
PREVGH: D2.2 D5.1 EPD_C9.2 J1.21
PREVGL: EPD_C11.2 J1.23
RESE: J1.3 Q3.2 R1_EP_DR.2
RESET: J2.6 TP_RESET.TP U1.P$AC13
SCK: J1.13 U1.P$A12
SCL: IC1.B1 IC2.C1 IC3.12 R4.1 R17.2 TP_SCL.TP U1.P$M2 U3.7
SDA: IC2.B2 U3.8
SDL: IC1.C1 IC3.2 R2.1 R18.2 TP_SDA.TP U1.P$L1
SWDCLK: J2.4 TP_SWDCLK.TP U1.P$AA24
SWDIO: J2.2 TP_SWDIO.TP U1.P$AC24
SWO: TP_SWO.TP U1.P$AD22
VBAT: C27.2 C37.2 IC1.C2 TP_VBAT.TP U3.2 U3.3
VBUS: C21.1 C38.2 C42.2 C43.1 D3.5 IC1.A2 J4.A4_B9 J4.A9_B4 U1.P$AD2
VREG: C23.1 C24.2 C39.1 IC1.B2 IC9.A1 IC9.A2 IC9.A3 TP_VREG.TP

## Tracks (layer width: path | path; a pad name or v marks a point on that pad's centre or on a via)
3V3  (via drill 0.15 pad 0.3)
  Top 0.254: 11.74,32.11 C34.2 11.74,30.09
  Top 0.3: 21.6,6.72 10.85,6.72 10.55,6.42 10.55,6 R7.2 | 21.6,6.72 26.75,6.72 27.69,5.79 30.75,5.79 | 30.75,5.79 R5.2 | R8.2 21.6,6.01 21.6,6.72 | 34.25,18.47 C8.1 | 34.25,18.47 U1.P$AD23 | U1.P$AD14 31.75,18.37 | 31.75,18.37 C7.1 31.75,14.47 | 31.75,14.47 31.75,14.17 30.75,13.17 30.75,7.62 | 30.75,7.62 30.75,5.79 | U1.P$Y2 28.5,20.22 U1.P$W1 27.12,19.34 24.27,19.34 23.3,18.37 22.75,18.37 | 22.75,19.02 22.75,20.22 22.45,20.52 IC3.10 22.19,22.39 C6.1 | 22.75,19.02 22.75,18.37 | 22.75,18.37 22.75,17.72 | 22.75,17.72 22.75,15.38 C33.1 22.75,15.31 22.75,15.07 23.35,14.47 31.75,14.47 | 19.55,19.52 IC3.3 | 12.1,33.48 R18.1 | 12.1,33.48 R17.1 | TP_3V3.TP 7.52,33.17 8.67,34.32 v11.7,34.32 11.75,34.32 12.1,33.97 12.1,33.48 | 11.74,30.09 12.25,29.57 IC2.C2 | 11.74,32.11 12.1,32.47 12.1,33.48 | U1.P$B1 29.06,25.78 C14.1 29.06,28.03 29.6,28.57 v31.35,28.57 33.1,28.57 33.75,27.93 C12.1 U1.P$A22 | R_PWR_EPD.2 41,14.58 41,14.45 Q1.2 42.81,5.22 TP_3.3V.TP 39.5,3.92 35.8,7.62 v35.45,7.62 30.75,7.62 | 19.55,18.57 19.55,18.17 20.05,17.67 22.7,17.67 22.75,17.72 | 19.55,18.57 19.55,19.52 | 31.75,18.37 31.85,18.47 34.25,18.47 | IC9.E3 19.55,18.57 | J2.1 35.78,12.45 v35.15,11.82 | C19.1 19.11,20.71 19.55,20.27 19.55,19.52 | IC3.7 22.75,19.02
  Bottom 0.3: U1.P$A22 34.25,24.97 U1.P$AD23 | v11.7,34.32 17.97,34.32 20.47,31.82 29.3,31.82 31.35,29.77 v31.35,28.57 | v35.45,7.62 35.45,11.52 v35.15,11.82
  other vias: 34.25,18.97 33.75,25.47
ALERT  (via drill 0.15 pad 0.3)
  Top 0.15: v21.4,27.92 20.4,27.92 v19.5,27.02 | v18.85,26.37 18.85,25.82 18.36,25.33 U3.5
  Bottom 0.15: U1.P$J24 34.75,23.47 35.5,24.22 35.5,27.42 35.25,27.67 31.45,27.67 31.2,27.92 v21.4,27.92 | v19.5,27.02 v18.85,26.37
  other vias: 34.75,22.97
D+  (via drill 0.15 pad 0.3)
  Top 0.15: v16.1,29.22 D3.4 | v24.85,22.82 25.65,22.01 25.65,21.47 v26.7,20.45
  Bottom 0.15: U1.P$AD6 28.28,20.45 v26.7,20.45 | v24.85,22.82 18.44,29.22 v16.1,29.22
  other vias: 29.75,18.97
D-  (via drill 0.15 pad 0.3)
  Top 0.15: v17.95,28.67 17.95,30.65 D3.6 | v24.54,22.51 25.25,21.8 25.25,21.37 v26.65,19.97
  Bottom 0.15: U1.P$AD4 28.25,19.97 v26.65,19.97 | v24.54,22.51 18.39,28.67 v17.95,28.67
  other vias: 29.25,18.97
DEC1
  Top 0.15: C5.1 27.6,24.82 27.95,24.47 U1.P$C1
DEC3
  Top 0.15: C11.1 35.55,26.32 34.25,25.02 U1.P$D23
DEC4_6  (via drill 0.15 pad 0.3)
  Top 0.15: 42.16,29.69 42.16,30.36 C15.1 42.19,31.88 L3.2 | 42.16,29.69 42.16,28.83 41.8,28.47 38.1,28.47 36.1,26.47 36.1,25.07 35.7,24.67 35,24.67 34.75,24.42 U1.P$E24 | U1.P$B5 29.5,25.17 30.2,25.87 31.7,25.87 31.9,26.07 v31.9,26.12 | 42.16,29.69 C16.1 C10.1
  Bottom 0.15: v31.9,26.12 34.25,26.12 34.75,25.62 U1.P$E24
  other vias: 34.75,23.97
DN  (via drill 0.15 pad 0.3)
  Top 0.15: D3.1 18.7,33.2 19.49,32.41 24.71,32.41 24.8,32.32 v24.8,31.32 | J4.A7 24.27,29.79 24.5,30.02 v24.8,30.02 25.1,30.02 25.3,29.82 25.3,28.98 J4.B7
  Bottom 0.15: v24.8,31.32 v24.8,30.02
DP  (via drill 0.15 pad 0.3)
  Top 0.15: D3.3 16.1,32.42 16.4,32.12 24.1,32.12 24.2,32.02 v24.2,31.27 | J4.A6 24.77,28.29 24.6,28.12 23.95,28.12 23.77,28.3 J4.B6 v23.77,30.02
  Bottom 0.15: v24.2,31.27 24.2,30.82 23.77,30.39 v23.77,30.02
EPD_3V3  (via drill 0.15 pad 0.3)
  Top 0.15: 44.95,15.44 Q1.3
  Top 0.3: J1.16 J1.15 10.43,16.27 8.89,16.27 8.57,16.59 8.57,24.28 7.78,25.07 6.66,25.07 EPD_C5.2 | J1.16 10.41,15.72 v9.6,15.72 8.62,14.74 8.62,10.75 8.14,10.27 7.7,10.27 6.85,9.42 6.85,7.72 6.6,7.47 5.55,7.47 4.08,6 L5.2 4.08,5.78 4.05,5.81 C1-EP-DR.1 | J1.16 10.46,15.77 v12.15,15.77 | v32.3,15.77 32.9,15.77 33.17,16.04 37.71,16.04 37.72,16.02 v40.3,16.02 | v41.15,16.87 41.33,17.05 44.32,17.05 44.95,16.42 44.95,15.44
  Bottom 0.3: v12.15,15.77 v32.3,15.77 | v40.3,16.02 v41.15,16.87
EPD_BUSY  (via drill 0.15 pad 0.3)
  Top 0.15: J1.9 11.83,19.24 12.15,18.92 v12.15,17.01 | v31.05,17.47 31.05,17.97 31.25,18.17 U1.P$AD12
  Bottom 0.15: v12.15,17.01 30.59,17.01 v31.05,17.47
EPD_CS  (via drill 0.15 pad 0.3)
  Top 0.15: v9.8,17.72 9.82,17.74 J1.12
  Bottom 0.15: v9.8,17.72 9.8,18.42 11.2,19.82 24.17,19.82 26.92,22.57 28.6,22.57 U1.P$K2
  other vias: 28.75,22.72
EPD_DC  (via drill 0.15 pad 0.3)
  Top 0.15: v30.75,18.17 U1.P$AD10 | v11.55,18.22 10.45,18.22 J1.11
  Bottom 0.15: v30.75,18.17 29.95,17.37 11.7,17.37 11.55,17.52 v11.55,18.22
EPD_RST  (via drill 0.15 pad 0.3)
  Top 0.15: v11.1,18.77 10.46,18.77 J1.10
  Bottom 0.15: U1.P$AC11 32,18.47 32,17.67 30.91,16.58 11.44,16.58 11.1,16.92 v11.1,18.77
  other vias: 31,19.47
GDR  (via drill 0.15 pad 0.3)
  Top 0.15: R2_EP_DR.2 4.8,8.02 4.8,7.99 | 4.8,7.99 3.35,7.99 3.27,7.85 Q3.1 | v4.8,7.52 4.8,7.99 | v11.35,22.72 10.45,22.72 J1.2
  Bottom 0.15: v4.8,7.52 5.4,8.12 5.4,9.17 5.85,9.62 7.35,9.62 8.15,10.42 8.15,21.47 8.55,21.87 11.1,21.87 11.35,22.12 v11.35,22.72
GND  (via drill 0.15 pad 0.3)
  Top 0.3: IC9.C3 IC9.C2 IC9.C1 | J2.5 J2.3 35.38,13.42 | 35.07,13.42 35.38,13.42 | C22.2 38.91,21.76 38.91,21.32 | C4.2 39.01,21.32 38.91,21.32 | v36.75,20.92 37.6,20.92 38,21.32 38.91,21.32 | U1.P$F23 33.6,23.72 U1.P$78 | U1.P$B7 30,24.32 U1.P$75 | U3.6 16.86,25.83 U3.9 | 35.38,13.42 35.4,13.42 | J4.A12_B1 20.78,28.96 J4.SH4 | C18.1 | v38,26.87 38.79,26.08 39.14,26.08 39.3,25.92 C3.2
  other vias: 36,23.82 36.75,23.82 36.75,23.02 36.05,23.02 35.35,23.02 36.75,24.52 36.75,25.22 37,25.87 37.5,26.37 38.5,27.37 39,27.87 39.7,27.92 40.4,27.92 41.1,27.92 41.8,27.92 42.5,27.92 43.2,27.92 43.9,27.92 44.6,27.92 45.3,27.92 36.75,22.32 36.75,21.62 36.75,20.22 37.35,19.67 40.15,17.57 40.85,17.57 41.55,17.57 42.25,17.57 42.95,17.57 43.65,17.57 44.35,17.57 17.6,0.62 28.8,0.57 12.55,8.47 0.65,6.42 10.85,28.62 12.35,30.62 21.4,19.47 25.4,19.77 23.55,17.77 25.1,26.52 23.4,26.32 31.2,27.02 35.75,28.77 33.3,26.97 33.9,28.77 31.5,22.22 35.15,17.27 8.65,15.72 9.45,14.72 21.45,22.47 17.55,20.77 13.8,29.32 34.3,26.97 26.46,27.3 27.6,27.3
  pour Top: 46,35.02 0,35.02 0,-0.03 46,-0.03
  pour Bottom: 46,35.02 0,35.02 0,-0.03 46,-0.03
HAPTIC_EN  (via drill 0.15 pad 0.3)
  Top 0.15: v14.3,28.12 12.79,28.12 IC2.A1 | v25.23,23.47 25.23,23.44 27.7,20.97 U1.P$U1
  Bottom 0.15: v14.3,28.12 14.3,28.62 15.3,29.62 18.51,29.62 20.41,27.72 20.95,27.72 25.2,23.47 v25.23,23.47
IMU_INT1  (via drill 0.15 pad 0.3)
  Top 0.15: IC3.5 v21.16,18.43 v21.15,18.42 | U1.P$N1 v27.73,21.45 v27.72,21.45
  Bottom 0.15: v21.15,18.42 21.6,17.97 23.1,17.97 26.5,21.37 27.64,21.37 v27.72,21.45
IMU_INT2  (via drill 0.15 pad 0.3)
  Top 0.15: IC3.6 v21.66,18.43 v21.65,18.42
  Bottom 0.15: v21.65,18.42 23.16,18.42 26.46,21.72 27.5,21.72 27.58,21.8 27.87,21.8 27.95,21.72 U1.P$P2
  other vias: 28.75,21.72
LX1
  Top 0.15: L7.1 13.26,20.71 14.17,19.8 IC9.B3 IC9.B2
LX2
  Top 0.15: IC9.D2 IC9.D3 14.97,19.69 15.5,20.22 15.5,21.82 L7.2
MOSI  (via drill 0.15 pad 0.3)
  Top 0.15: v9.45,16.77 10.4,16.77 J1.14
  Bottom 0.15: U1.P$B13 28.93,24.97 24.05,20.1 10.73,20.1 9.45,18.82 v9.45,16.77
  other vias: 31.5,24.97
N$1  (via drill 0.15 pad 0.3)
  Top 0.15: U1.P$B3 29,25.12 30.03,26.15 31.31,26.15 31.6,26.44 31.6,27.52 32.05,27.97 32.65,27.97 v32.7,28.02 | v32.7,29 32.7,29.42 35.4,32.12 35.4,34.27 40.89,34.27 41.95,33.21 L2.1
  Bottom 0.15: v32.7,29 v32.7,28.02
N$2
  Top 0.15: 41.16,32.72 L3.1
  Top 0.3: L2.2 41.11,32.77 41.16,32.72
N$3
  Top 0.15: C13.1 32.29,26.19 32.75,25.72 U1.P$A18
N$5
  Top 0.15: X1.1 39.15,32.82 39.7,32.27 39.7,30.47 39.01,29.78 C1.1 38.65,29.47 35.82,26.64 35.82,25.44 35.35,24.97 U1.P$B24
N$6
  Top 0.15: X1.3 36.96,30.98 36.47,30.48 C2.1 36.2,30.07 35.45,30.07 34.75,29.37 34.75,25.97 U1.P$A23
N$7
  Top 0.15: C3.1 L1.1 38.61,23.42 34.45,23.42 U1.P$H23
N$8
  Top 0.15: ANT1.1 41.52,23.61 L1.2 39.7,23.51 39.7,22.87 39.69,22.86 C22.1 39.69,20.51 C4.1
N$9
  Top 0.15: C9.1 U1.P$N24
N$10
  Top 0.15: U1.P$AC5 29.4,19.37 28.2,19.37 27.13,18.3 C20.1
N$11  (via drill 0.15 pad 0.3)
  Top 0.15: IC9.D1 14.97,17.45 15.2,17.22 16.75,17.22 17.15,17.62 v17.15,17.77 | R4.2 17.59,21.36 17.15,20.92 v17.15,19.42
  Bottom 0.15: v17.15,17.77 v17.15,19.42
N$12  (via drill 0.15 pad 0.3)
  Top 0.15: R2.2 17.37,21.89 16.55,21.06 v16.55,19.42 | IC9.E1 15.4,17.8 15.41,17.79 v16.55,17.79
  Bottom 0.15: v16.55,17.79 v16.55,19.42
N$13
  Top 0.15: R9.2 20.46,24.07 IC1.D1
N$14
  Top 0.15: C25.1 17.65,17.82 17.3,18.17 IC9.E2
N$15
  Top 0.15: IC3.1 20.44,20.72 20.44,22.14 R3.2
N$16  (via drill 0.15 pad 0.3)
  Top 0.15: C2-EP-DR.2 20.7,8.54 20.7,8.51 | 20.7,8.51 21.64,8.51 22.36,9.23 D5.2 | v20.7,7.62 20.7,8.51 | v9.5,4.92 8.71,4.92 8.46,4.66 L5.1 8.65,1.26 3.81,1.26 1.22,3.85 Q3.3
  Bottom 0.15: v20.7,7.62 20.7,6.12 20.2,5.62 20.2,3.27 19.6,2.67 16.55,2.67 14.3,4.92 v9.5,4.92
N$17
  Top 0.15: D4.2 26.62,9.69 24.15,7.22 18.7,7.22 17.98,7.94 17.98,8.42 18.49,8.42 | D2.1 18.49,8.42 | C2-EP-DR.1 19.77,8.42 18.49,8.42
N$18  (via drill 0.15 pad 0.3)
  Top 0.15: R1_TYPE_SEL.2 17.7,1.62 17.2,1.62 16.95,1.87 16.95,4.36 SJ1.2 15.74,4.58 14.95,5.37 v14.25,5.37 | v6.2,8.92 R1_EP_DR.1
  Bottom 0.15: v6.2,8.92 6.2,5.92 6.75,5.37 v14.25,5.37
N$19
  Top 0.15: EPD_C2.2 9.3,25.78 9.3,22.07 9.65,21.72 10.41,21.72 J1.4
N$20
  Top 0.15: EPD_C1.2 8.95,24.43 8.95,21.77 9.48,21.24 J1.5
N$21
  Top 0.15: EPD_C6.2 12.58,14.74 J1.18
N$22
  Top 0.15: EPD_C7.2 14.25,11.83 11.84,14.24 J1.19
N$23
  Top 0.15: EPD_C8.2 12.73,12.85 11.84,13.74 J1.20
N$24
  Top 0.15: R1_USB.2 25.4,27.98 25.77,28.35 J4.A5
N$25
  Top 0.15: EPD_C10.2 7.62,9.39 8.05,9.82 8.19,9.82 8.97,10.61 8.97,11.99 9.72,12.74 J1.22
N$26
  Top 0.15: J4.B5 22.77,28.23 23.32,27.68 R2_USB.1
N$27
  Top 0.15: EPD_C12.2 11.15,9.15 11.15,11.52 10.93,11.74 J1.24
N$32
  Top 0.15: IC2.A2 12.25,26.39 C32.2
OUT+
  Top 0.15: TP_OP.TP 2.68,27.15 3.65,28.12 11.71,28.12 IC2.A3
OUT-
  Top 0.15: TP_ON.TP 3.8,28.42 10,28.42 10.75,29.17 IC2.C3
P0.00/XL1
  Top 0.15: C17.2 24,26.12 | 24,26.12 24,25.06 X2.2 | U1.P$D2 28.7,24.17 28.38,24.17 27.61,24.17 27.05,24.73 27.05,27.72 26.8,27.97 26.1,27.97 25.85,27.72 25.85,26.47 25.5,26.12 24,26.12
P0.01/XL2  (via drill 0.15 pad 0.3)
  Top 0.15: v27.6,23.02 26.32,24.3 X2.1 26.45,25.01 C18.2
  Bottom 0.15: U1.P$F2 28.35,23.32 27.9,23.32 v27.6,23.02
  other vias: 28.75,23.72
P0.13  (via drill 0.15 pad 0.3)
  Top 0.15: C30.2 33.5,5.66 | SW_UP.2 R5.1 33.03,5.24 33.4,5.6 33.5,5.6 33.5,5.66 | SW_UP.2 | v33.5,6.32 33.5,5.66 | U1.P$AD8 30.3,18.92 v30.3,15.21
  Bottom 0.15: v33.5,6.32 31.5,6.32 30.3,7.52 v30.3,15.21
P0.14  (via drill 0.15 pad 0.3)
  Top 0.15: C31.2 22.6,5.6 | 22.6,5.6 22.38,5.6 22.21,5.44 R8.1 SW_ENT.2 | 22.6,5.6 v22.6,6.27 | v24.05,15.16 v24.05,17.92
  Bottom 0.15: U1.P$AC9 30.5,18.87 30.12,18.49 24.63,18.49 v24.05,17.92 | v22.6,6.27 24.05,7.72 v24.05,15.16
  other vias: 30.5,19.47
P1.01
  Top 0.15: U1.P$Y23 34.25,19.47 36.6,17.12 40.3,17.12 41.01,16.41 41.01,15.77 | 41.01,15.77 R_PWR_EPD.1 | Q1.1 42.23,15.77 41.01,15.77
P1.02  (via drill 0.15 pad 0.3)
  Top 0.15: SW_DN.2 R7.1 11.07,5.44 11.23,5.6 11.4,5.6 11.4,5.63 | 11.4,5.63 C29.2 | 11.4,5.63 v11.4,6.22 | v32.4,16.62 33.21,16.62 v33.23,16.6 | U1.P$W24 35.28,20.47 36.95,18.8 v36.95,17.62
  Bottom 0.15: v11.4,6.22 11.4,15.83 11.84,16.27 32.05,16.27 v32.4,16.62 | v33.23,16.6 36.63,16.6 36.95,16.92 v36.95,17.62
PMIC_INT  (via drill 0.15 pad 0.3)
  Top 0.15: IC1.A1 20.6,26.92 v20.93,27.24
  Top 0.152: v26.7,20.97 26,21.67 26,22.17 v24.8,23.37
  Bottom 0.152: U1.P$T2 28.5,20.97 v26.7,20.97 | v24.8,23.37 v20.93,27.24
  other vias: 28.75,21.22
PREVGH
  Top 0.15: EPD_C9.2 14.66,9.82 | J1.21 10.83,13.24 11.5,12.57 11.5,10.52 12.2,9.82 14.66,9.82 | 14.66,9.82 16.3,9.82 16.75,10.27 16.75,13.17 17.15,13.57 18.42,13.57 D2.2 18.52,13.47 D5.1
PREVGL
  Top 0.15: J1.23 9.74,12.24 9.25,11.75 EPD_C11.2
RESE  (via drill 0.15 pad 0.3)
  Top 0.15: R1_EP_DR.2 4.8,8.92 | 4.8,8.92 3.46,8.92 3.27,9.11 Q3.2 | v4.8,9.52 4.8,8.92 | J1.3 9.72,22.24 v9.7,22.22
  Bottom 0.15: v4.8,9.52 5.3,10.02 7.05,10.02 7.75,10.72 7.75,21.52 8.45,22.22 v9.7,22.22
RESET  (via drill 0.15 pad 0.3)
  Top 0.15: J2.6 33.24,11.43 v32.8,11.87 | TP_RESET.TP 40.3,12.82 v37.94,12.82
  Bottom 0.15: U1.P$AC13 32.8,18.17 32.8,15.76 32.38,15.33 32.38,13.73 32.78,13.32 32.78,12.82 | 32.78,12.82 32.78,11.89 v32.8,11.87 | v37.94,12.82 32.78,12.82
  other vias: 31.5,19.47
SCK  (via drill 0.15 pad 0.3)
  Top 0.15: v9,17.22 10.41,17.22 J1.13
  Bottom 0.15: v9,17.22 9,18.77 10.61,20.38 23.94,20.38 29.03,25.47 U1.P$A12
  other vias: 31.25,25.47
SCL  (via drill 0.15 pad 0.3)
  Top 0.15: 19.6,25.02 IC1.B1 | R4.1 18.49,21.37 v19.6,21.37 | v21.15,21.07 v21.16,21.06 IC3.12 | TP_SCL.TP R17.2 12.6,32.92 12.6,32.07 13,31.67 13,30.86 12.75,30.61 12.75,29.97 | 12.75,29.97 IC2.C1 | 19.6,25.02 19.6,26.22 18.83,26.99 | 12.75,29.97 14.65,29.97 16.6,28.02 17.8,28.02 18.83,26.99 | v26.07,23.1 27.05,22.12 v27.35,22.12 | U3.7 17.61,26.34 18.19,26.34 18.83,26.99 | 19.6,25.02 19.6,22.32 v19.55,22.27
  Bottom 0.15: U1.P$M2 28.65,22.12 v27.35,22.12 | v26.07,23.1 24.04,21.07 v21.15,21.07 20.5,21.07 20.2,21.37 v19.6,21.37 19.6,22.22 v19.55,22.27
  other vias: 28.75,22.22
SDA  (via drill 0.15 pad 0.3)
  Top 0.15: U3.8 17.16,27.27 16.25,27.27 14.85,28.67 v13.8,28.67 | IC2.B2 v12.25,28.67
  Bottom 0.15: v12.25,28.67 v13.8,28.67
SDL  (via drill 0.15 pad 0.3)
  Top 0.15: 11.25,32.94 R18.2 | 11.25,32.94 v11.25,32.32 | IC3.2 20.32,20.02 20,20.34 v20,21.87 | R2.1 19.99,21.88 v20,21.87 | v25.68,23.5 25.7,23.47 26.2,23.47 27.2,22.47 U1.P$L1 | 11.25,32.94 9.88,32.94 TP_SDA.TP | v20,21.87 19.95,21.87 19.9,21.92 19.9,24.09 20.43,24.62 IC1.C1 v20.6,24.62
  Bottom 0.15: v11.25,32.32 11.25,28.17 14.8,24.62 v20.6,24.62 | v20,21.87 24.4,21.87 25.65,23.12 25.65,23.47 v25.68,23.5
SWDCLK  (via drill 0.15 pad 0.3)
  Top 0.15: J2.4 35.55,10.25 35.55,8.76 36.43,7.88 38.02,7.88 38.87,8.72 v39.55,8.72 40.58,7.7 TP_SWDCLK.TP | v39.55,18.37 v39.55,17.57
  Bottom 0.15: U1.P$AA24 35.55,19.17 39.15,19.17 39.55,18.77 v39.55,18.37 | v39.55,17.57 v39.55,8.72
  other vias: 34.75,19.97
SWDIO  (via drill 0.15 pad 0.3)
  Top 0.15: J2.2 36.55,11.29 36.95,10.88 37.99,10.88 38.75,10.12 v39.1,10.12 v42.1,10.12 | v43.5,10.12 44.21,9.41 TP_SWDIO.TP | v39.1,18.37 v39.1,17.57
  Bottom 0.15: v42.1,10.12 v43.5,10.12 | U1.P$AC24 35.35,18.87 39,18.87 39.1,18.77 v39.1,18.37 | v39.1,10.12 v39.1,17.57
  other vias: 34.75,19.47
SWO  (via drill 0.15 pad 0.3)
  Top 0.15: v45.2,12.82 44.41,12.03
  Top 0.3: 44.41,12.03 TP_SWO.TP
  Bottom 0.15: U1.P$AD22 33.75,18.47 34.25,17.97 44.5,17.97 45.55,16.92 45.55,13.17 v45.2,12.82
  other vias: 33.75,18.97
VBAT  (via drill 0.15 pad 0.3)
  Top 0.15: C27.2 4.55,29.77 | C37.2 4.5,29.75 4.52,29.77
  Top 0.2: IC1.C2 21.25,24.62
  Top 0.3: U3.2 U3.3 14.96,25.83 14.4,25.27 v14.4,24.32 | v7.45,31.27 TP_VBAT.TP 5.95,29.77 4.55,29.77 4.52,29.77 | 21.25,24.62 v21.9,23.97
  Bottom 0.3: v7.45,31.27 v14.4,24.32 14.75,23.97 v21.9,23.97
VBUS  (via drill 0.15 pad 0.3)
  Top 0.15: 33.35,32.02 33.98,32.02 C42.2
  Top 0.254: C38.2 22.16,26.72
  Top 0.3: 25.45,30.47 23.6,30.47 23.38,30.7 | 25.45,30.47 25.45,31.07 26.43,32.05 C43.1 33.32,32.05 33.35,32.02 | C21.1 27,16.57 28.75,18.32 U1.P$AD2 | 23.38,30.7 22.4,31.67 17.35,31.67 17.05,31.37 D3.5 | 22.15,26.72 22.15,26.12 22.94,25.33 22.94,23.78 23.35,23.37 23.8,23.37 24.07,23.1 24.07,21.7 v25.8,19.97 | IC1.A2 21.01,26.43 21.3,26.72 22.15,26.72 | 23.38,30.7 22.12,29.44 J4.A9_B4 22.16,28.92 22.16,26.72 22.15,26.72 | 25.45,30.47 25.96,30.47 26.92,29.51 J4.A4_B9 | 22.16,26.72 22.15,26.72
  Bottom 0.3: U1.P$AD2 26.8,18.97 v25.8,19.97
  other vias: 28.75,18.97
VREG  (via drill 0.15 pad 0.3)
  Top 0.15: 14.05,13.82 14.55,13.32 C23.1 | TP_VREG.TP 5.38,32.89 5.55,32.72
  Top 0.2: 21.65,25.02 IC1.B2
  Top 0.3: 16.96,23.56 C39.1 | v6.15,31.97 5.55,32.57 5.55,32.72 | 16.96,23.56 12.63,23.56 12.2,23.13 12.2,20.67 13.77,19.1 IC9.A3 IC9.A2 IC9.A1 13.77,15.55 C24.2 13.95,13.92 14.05,13.82 | 21.65,25.02 22.5,24.17 v22.5,23.52 | v16.95,23.54 v16.95,23.55 16.96,23.56
  Bottom 0.3: v6.15,31.97 7.02,31.1 7.02,31.09 14.57,23.54 v16.95,23.54 22.48,23.54 v22.5,23.52
(copper drawn outside any net)
  shapes: Bottom area x1, Top area x1